# Altium PCB lab4.PcbDoc
Units mil, origin at the board's own origin, x right, y up, seen from the top; angles counter-clockwise.
Board outline 255.91 x 255.91 mil, 2 copper layers (Top Layer, Top, Bottom Layer, Bottom); 38 components, 25 nets, 88 pads, 1 vias.
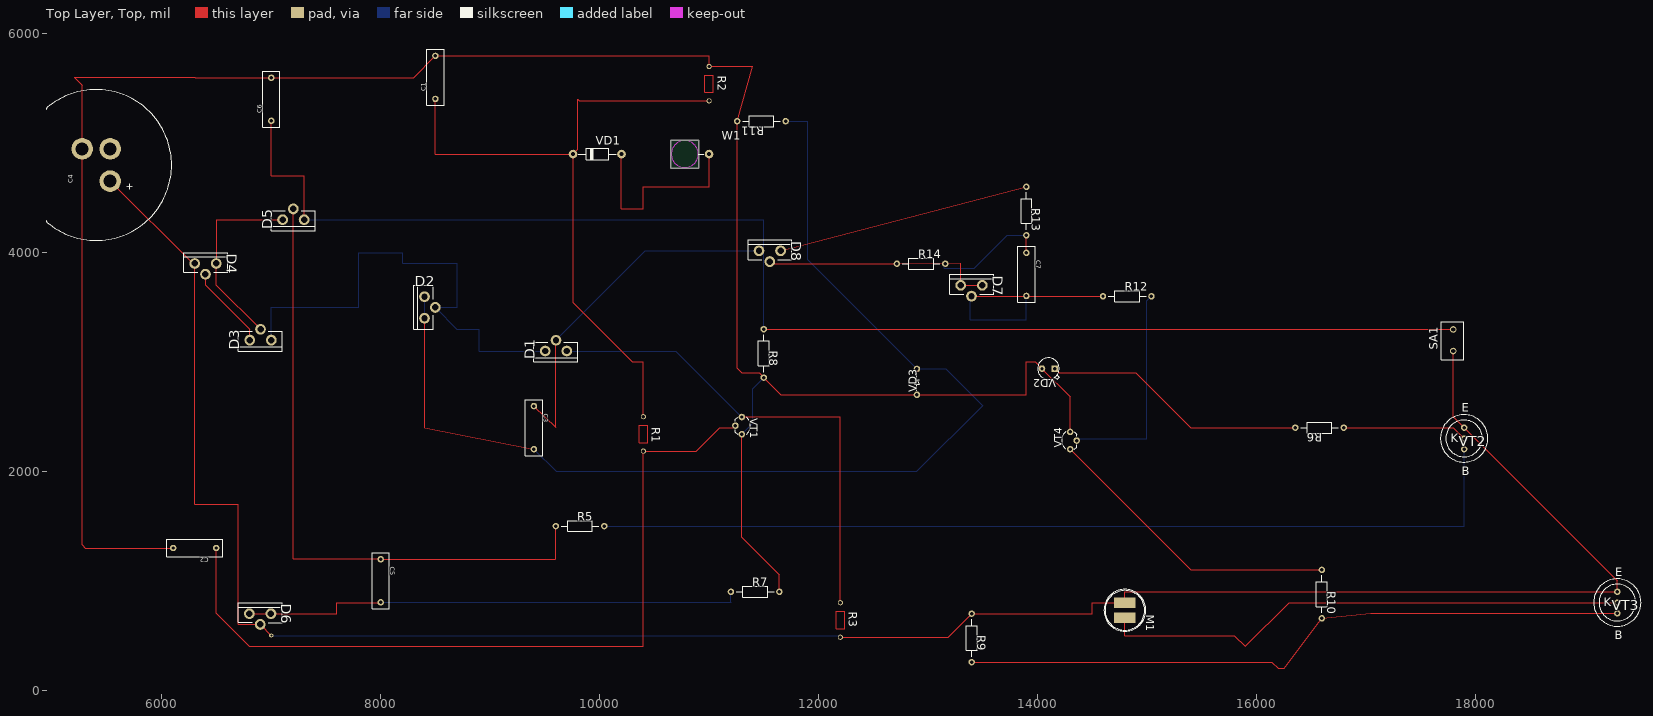
[diagram p0: Top Layer, Top view]
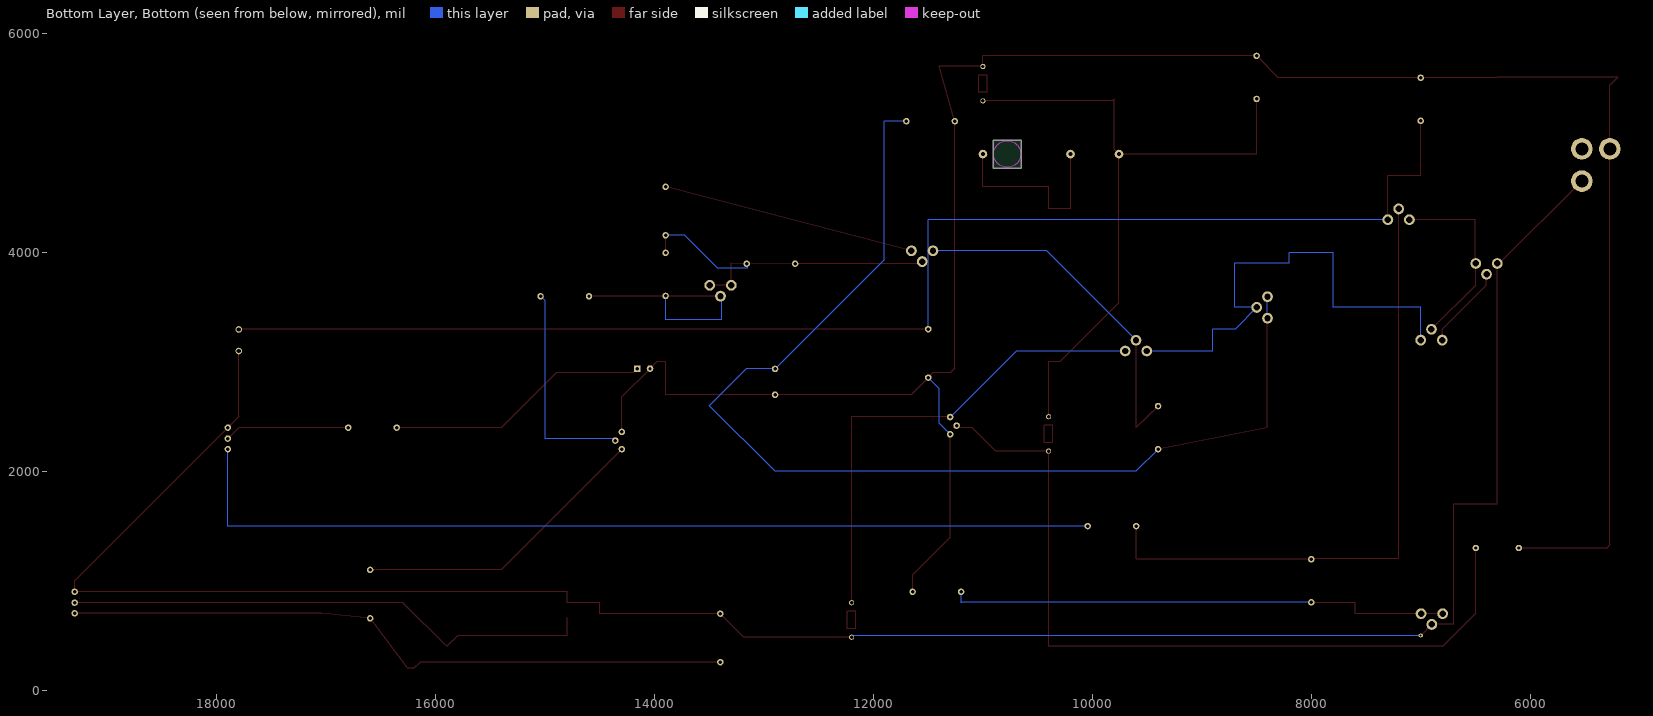
[diagram p1: Bottom Layer, Bottom view, seen from below]

## Layer stack, top to bottom
Top Solder, Top Mask: solder mask 0.4, Solder Resist, Dk 3.5
Top Layer, Top: signal copper 1.4
Dielectric 1: dielectric 12.6, FR-4, Dk 4.8
Bottom Layer, Bottom: signal copper 1.4
Bottom Solder, Bot Mask: solder mask 0.4, Solder Resist, Dk 3.5

## Board outline
10650.59,4772.05 10906.5,4772.05 10906.5,5027.95 10650.59,5027.95

## Design rules (kind name [scope] priority, off if disabled: settings)
Clearance [All] p1: gap=10 ignorepadtopadclearanceinfootprint=FALSE except(0: Arc-Hole Track-Hole SMDPad-Hole THPad-Hole Via-Hole Fill-Hole Poly-Hole Region-Hole Text-Hole; 11.81: Arc-Arc Arc-Track Arc-THPad Arc-Via Track-Track Track-THPad Track-Via THPad-THPad THPad-Via Via-Via)
PlaneClearance [All] p1: clearance=10
PolygonConnect [All] p1: connectstyle=Relief reliefconductorwidth=10 reliefentries=4 polygonreliefangle="90 Angle" airgapwidth=10
RoutingVias [All] p1: holewidth=28 width=50 viastyle="Through Hole" minholewidth=28 minwidth=50 maxholewidth=28 maxwidth=50
SolderMaskExpansion [All] p1: expansion=4 istentingtop=FALSE
Width [All] p1: maxlimit=10 minlimit=10 preferedwidth=10
29 further rules are at their usual default settings.

## Components (designator, comment, footprint, x,y, rotation, side; value= is the part's Value field where it differs from the comment)
C1 "" B32921(13X4) 8500,5600 r90 top
C2 "" B32921(13X4) 6300,1300 r180 top
C3 "" B32921(13X4) 9400,2400 r270 top
C4 "" B43505-3550 5400,4800 r90 top
C5 "" B32921(13X4) 8000,1000 r270 top
C6 "" B32921(13X4) 7000,5400 r90 top
C7 "" B32921(13X4) 13900,3800 r270 top
D1 "" KR142EN_Primary 9700,3100 r90 top
D2 "" KR142EN_Primary 8400,3400 r0 top
D3 "" KR142EN_Primary 7000,3200 r90 top
D4 "" KR142EN_Primary 6300,3900 r270 top
D5 "" KR142EN_Primary 7300,4300 r90 top
D6 "" KR142EN_Primary 6800,700 r270 top
D7 "" KR142EN_Primary 13300,3700 r270 top
D8 "" KR142EN_Primary 11456.69,4015.75 r270 top
M1 "" МКЭ-332 14800,800 r270 top
R1 "" R100 10400,2500 r270 top
R2 "" R100 11000,5700 r270 top
R3 "" R100 12200,800 r270 top
R5 "" C2-33H-0.125W 9600,1500 r0 top
R6 "" C2-33H-0.125W 16800,2400 r180 top
R7 "" C2-33H-0.125W 11200,900 r0 top
R8 "" C2-33H-0.125W 11500,3300 r270 top
R9 "" C2-33H-0.125W 13400,700 r270 top
R10 "" C2-33H-0.125W 16600,1100 r270 top
R11 "" C2-33H-0.125W 11700,5200 r180 top
R12 "" C2-33H-0.125W 14600,3600 r0 top
R13 "" C2-33H-0.125W 13900,4600 r270 top
R14 "" C2-33H-0.125W 12716.54,3897.64 r0 top
SA1 "" 8AS9M2RE 17800,3100 r90 top
VD1 "" DO-41(DO-204AL) 10200,4900 r0 top
VD2 "" HL5 14200,2900 r180 top
VD3 "" D6 12900,2700 r90 top
VT1 "" TO-92_Primary 11400,2500 r270 top
VT2 "" ГТ320Б 17900,2400 r0 top
VT3 "" ГТ320Б 19300,900 r0 top
VT4 "" TO-92_Primary 14200,2200 r90 top
W1 "" TELESKOP_ANTENNA_Primary 11000,4900 r0 top

## Footprints (in the part's own frame and the unit in brackets; to place one, negate y for a bottom-side part, rotate by r counter-clockwise, add the part's x,y. Pads: shape width x height; smd on the part's side, far side on the other; paste and mask are expansions set on the pad)
8AS9M2RE [mil]
  round 60 hole 38: 1(0,0) 2(196.85,0)
  silkscreen extent -79,-98 266,108
B32921(13X4) [mm]
  round 1.5 hole 0.8: 1(-5,0) 2(5,0)
  silkscreen extent -6.5,-2 6.5,2
B43505-3550 [mm]
  round 5 hole 3: 1(-3.75,-3.25) 2(3.75,3.25) 3(3.75,-3.25)
  silkscreen extent -17.5,-17.5 17.5,17.5
C2-33H-0.125W [mm]
  round 1.5 hole 0.8: 1(0,0) 2(11.25,0)
  silkscreen extent 1.25,-1.25 10,1.25
D6 [mil]
  round 60 hole 31.5: 1(0,0) 2(236.22,0)
  silkscreen extent 39,-19 196,20
DO-41(DO-204AL) [mm]
  round 2 hole 1: A(0,0) K(-11.25,0)
  silkscreen extent -10,-1.35 -1.25,1.35
HL5 [mm]
  rect 1.524x1.524 hole 0.8: 1(1,-1)
  round 1.524 hole 0.8: 2(4,-1)
  silkscreen extent 0,-3.5 5,1.5
KR142EN_Primary [mm]
  round 2.5 hole 1.5: 1(0,0) 2(2.5,2.5) 3(0,5)
  silkscreen extent -2.54,-2.56 2.06,7.62
R100 [mm]
  round 1.2 hole 0.8: 1(0,0) 2(8,0)
  Top Layer, Top lines w0.254: 6,-1 2,-1 2,1 6,1 6,-1
TELESKOP_ANTENNA_Primary [mm]
  round 2 hole 0.9: 1(0,0)
  Keep-Out Layer, Board lines w0.25: -8.75,0 cw(c-5.625,0) -2.5,0 cw(c-5.625,0) -8.75,0
  silkscreen extent -2.5,0 -1.25,0
TO-92_Primary [mm]
  round 1.524 hole 0.8: 1(0.08,-2.54) 2(4.08,-2.54) 3(2.08,-4.04)
  silkscreen extent 0.08,-4.04 4.12,-0.54
ГТ320Б [mm]
  round 1.5 hole 0.8: 1(0,0) 2(0,-2.54) 3(0,-5)
  silkscreen extent -5.5,-8 5.5,3
МКЭ-332 [mm]
  rect 2.5x5 smd: 1(0,0) 2(3.5,0)
  silkscreen extent -3.1,-4.85 6.6,4.85

## Via types
v1: diameter 40, hole 18, Top Layer, Top to Bottom Layer, Bottom, 1 vias

## Nets (pads, with @x,y where several pads share a name; then routed paths per layer and width w, separated by ;. In a path a pad name is that pad's centre, name@x,y a point inside that pad or via, vN(x,y) a via of type N, cw(c..) or ccw(c..) an arc to the next point about the centre after c; other vN are vias at no path point)
+14B: C4.1 D4.1 D6.2 M1.1 R3.2 R9.1 SA1.1 VT2.1 VT3.1 | length 20539.2
  Top Layer, Top w10: C4.1 6280.31,3900 D4.1 6300,1700 6700,1700 6700,603.15 D6.2 v1(7000,500) ; R3.2 13185.04,485.04 R9.1 14500,700 14500,800 M1.1 14800,900 VT3.1 19300,1000 VT2.1 17800,2500 SA1.1
  Bottom Layer, Bottom w10: v1(7000,500) 12185.04,500 R3.2
GND: C1.2 C2.2 C4.2 C6.2 R2.1 R7.2 R8.2 R11.2 VD2.2 VD3.1 VT1.2 VT4.2 | length 20385.7
  Top Layer, Top w10: C2.2 5300,1300 5272.05,1327.95 C4.2 5272.05,5527.95 5200,5600 6300,5600 6303.15,5596.85 C6.2 8300,5596.85 C1.2 10996.85,5796.85 11000,5800 R2.1 11400,5700 R11.2 11257.09,2942.91 11300,2900 11457.09,2900 R8.2 11657.09,2700 VD3.1 13900,2700 13900,3000 13981.89,3000 VD2.2 14300,2681.89 VT4.2 ; VT1.2 11300,1400 11642.91,1057.09 R7.2
  Bottom Layer, Bottom w10: VT1.2 11400,2439.37 11400,2757.09 R8.2
NET00000: VD1.A W1.1 | length 1800
  Top Layer, Top w10: VD1.A 10200,4400 10400,4400 10400,4600 11000,4600 W1.1
NET00001: C1.1 R1.1 R2.2 VD1.K | length 6209.1
  Top Layer, Top w10: C1.1 8500,4900 VD1.K ; R1.1 10400,3000 10300,3000 9757.09,3542.91 VD1.K ; R2.2 9814.96,5385.04 9800,5400 9800,4942.91 VD1.K
NET00002: C2.1 R1.2 VT1.3 | length 7348.1
  Top Layer, Top w10: C2.1 6496.85,703.15 6800,400 10400,400 R1.2 10885.04,2185.04 11100,2400 11222.83,2400 VT1.3
NET00003: D1.1 R3.1 VT1.1 | length 4451.1
  Top Layer, Top w10: VT1.1 11303.15,2500 12200,2500 R3.1
  Bottom Layer, Bottom w10: D1.1 10696.85,3100 VT1.1
NET00004: C3.1 D1.2 D8.1 | length 3265.8
  Top Layer, Top w10: C3.1 9601.57,2404.72 D1.2
  Bottom Layer, Bottom w10: D1.2 10418.9,4015.75 D8.1
NET00006: C3.2 D2.1 D2.3 R11.1 VD3.2 | length 10266
  Top Layer, Top w10: D2.1 8400,2400 C3.2
  Bottom Layer, Bottom w10: D2.1 D2.3 ; C3.2 9603.15,2000 12900,2000 13500,2600 13163.78,2936.22 VD3.2 11900,3936.22 11900,5200 R11.1
NET00007: D1.3 D2.2 D3.1 | length 4489.1
  Bottom Layer, Bottom w10: D3.1 7000,3500 7800,3500 7800,4000 8200,4000 8200,3900 8700,3900 8700,3500 8500,3500 D2.2 8696.85,3300 8900,3300 8900,3100 D1.3
NET00008: D3.2 D4.3 D5.3 | length 1773.7
  Top Layer, Top w10: D3.2 6496.85,3703.15 D4.3 6500,3903.15 6500,4300 D5.3
NET00009: D3.3 D4.2 | length 769.2
  Top Layer, Top w10: D4.2 6400,3800 6400,3700 6803.15,3296.85 D3.3
NET00012: C6.1 D5.1 R8.1 SA1.2 | length 12704.5
  Top Layer, Top w10: C6.1 7000,4700 7300,4700 D5.1 ; R8.1 11503.15,3296.85 SA1.2
  Bottom Layer, Bottom w10: D5.1 11500,4300 R8.1
NET00013: C5.1 D5.2 R5.1 | length 5901.7
  Top Layer, Top w10: D5.2 7201.57,1201.57 7200,1200 7996.85,1200 C5.1 9596.85,1196.85 9600,1200 R5.1
NET00014: R5.2 VT2.3 | length 8560.2
  Bottom Layer, Bottom w10: R5.2 17900,1500 VT2.3
NET00015: R6.1 VT2.2 | length 1141.4
  Top Layer, Top w10: R6.1 17800,2400 VT2.2
NET00016: R6.2 VD2.1 | length 2419.9
  Top Layer, Top w10: VD2.1 14200,2900 14900,2900 15400,2400 R6.2
NET00017: C5.2 D6.1 D6.3 R7.1 | length 4602.6
  Top Layer, Top w10: D6.1 D6.3 7600,700 7600,800 7996.85,800 C5.2
  Bottom Layer, Bottom w10: C5.2 11196.85,803.15 11200,800 R7.1
NET00018: M1.2 VT3.2 | length 4869.3
  Top Layer, Top w10: M1.2 14800,500 15800,500 15900,400 16300,800 VT3.2
NET00019: R9.2 R10.2 VT3.3 | length 6154.5
  Top Layer, Top w10: R9.2 16142.91,257.09 16200,200 16257.09,200 R10.2 17046.06,703.15 VT3.3
NET00022: R12.2 VT4.3 | length 1966.2
  Bottom Layer, Bottom w10: VT4.3 14377.17,2300 15000,2300 15000,3557.09 R12.2
NET00023: C7.2 D7.2 R12.1 | length 2153.3
  Top Layer, Top w10: D7.2 13400,3600 R12.1
  Bottom Layer, Bottom w10: D7.2 13385.83,3588.98 13385.83,3385.83 13897.64,3385.83 13900,3388.19 C7.2
NET00024: C7.1 R13.2 R14.2 | length 1077.9
  Top Layer, Top w10: C7.1 R13.2
  Bottom Layer, Bottom w10: R14.2 13149.61,3887.8 13149.61,3858.27 13425.2,3858.27 13724.02,4157.09 R13.2
NET00025: D8.3 R13.1 | length 2321.2
  Top Layer, Top w10: D8.3 R13.1
NET00026: D7.1 D7.3 D8.2 R14.1 | length 2149.9
  Top Layer, Top w10: D8.2 11574.8,3897.64 R14.1 13300,3900 D7.1 D7.3
NET00027: R10.1 VT4.1 | length 2756.9
  Top Layer, Top w10: VT4.1 15403.15,1100 R10.1
pads on no net: C4.3

## Text inside footprints (layer, text, board x,y; h text height)
C4: Top Overlay, Top Silk "+" at 5734.65,4563.78 h62.5 r90; Mechanical 1, Top Assy "+" at 5734.65,4563.78 h62.5 r90
D1: Mechanical 1, Top Assy "1" at 9800,3184.22 h125 r180
D2: Mechanical 1, Top Assy "1" at 8484.22,3300 h125 r90
D3: Mechanical 1, Top Assy "1" at 7100,3284.22 h125 r180
D4: Mechanical 1, Top Assy "1" at 6200,3815.78 h125
D5: Mechanical 1, Top Assy "1" at 7400,4384.22 h125 r180
D6: Mechanical 1, Top Assy "1" at 6700,615.78 h125
D7: Mechanical 1, Top Assy "1" at 13200,3615.78 h125
D8: Mechanical 1, Top Assy "1" at 11356.69,3931.53 h125
VT2: Top Overlay, Top Silk "E" at 17879.64,2543.21 h78.12; Top Overlay, Top Silk "B" at 17878.04,1966.04 h78.12; Top Overlay, Top Silk "K" at 17778.04,2266.04 h78.12; Mechanical 1, Top Assy "E" at 17879.64,2543.21 h78.12; Mechanical 1, Top Assy "B" at 17878.04,1966.04 h78.12; Mechanical 1, Top Assy "K" at 17778.04,2266.04 h78.12
VT3: Top Overlay, Top Silk "E" at 19279.64,1043.21 h78.12; Top Overlay, Top Silk "B" at 19278.04,466.04 h78.12; Top Overlay, Top Silk "K" at 19178.04,766.04 h78.12; Mechanical 1, Top Assy "E" at 19279.64,1043.21 h78.12; Mechanical 1, Top Assy "B" at 19278.04,466.04 h78.12; Mechanical 1, Top Assy "K" at 19178.04,766.04 h78.12